# EAGLE board giraffe-cjd-simple (EAGLE 9.1.0)
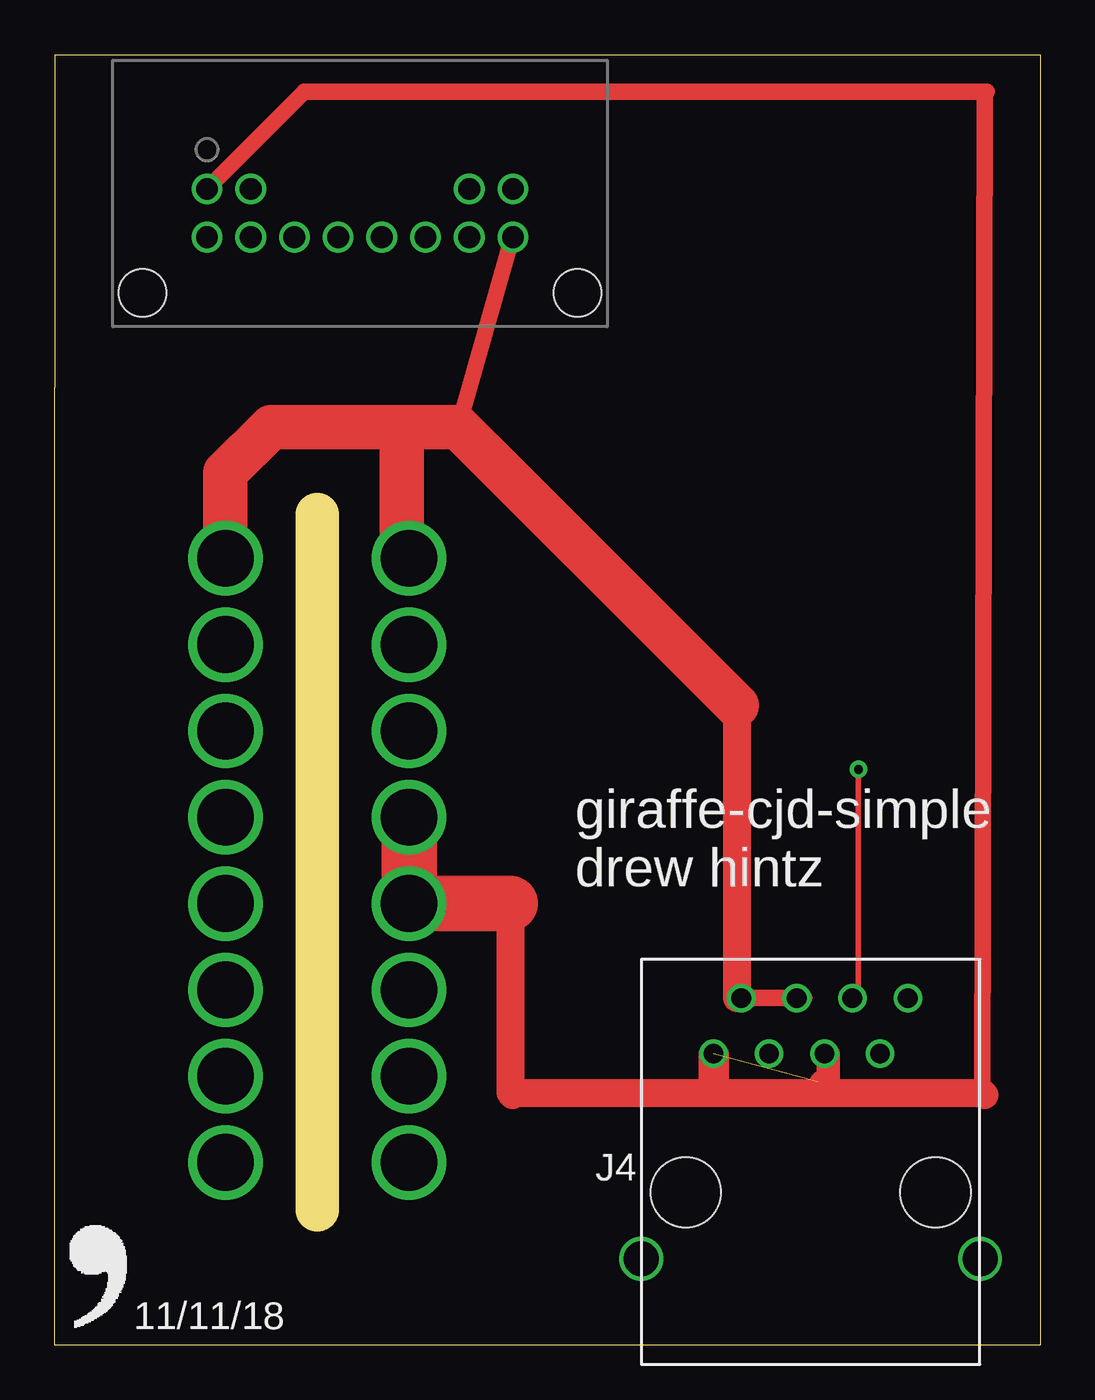
[diagram p0: board, top side]
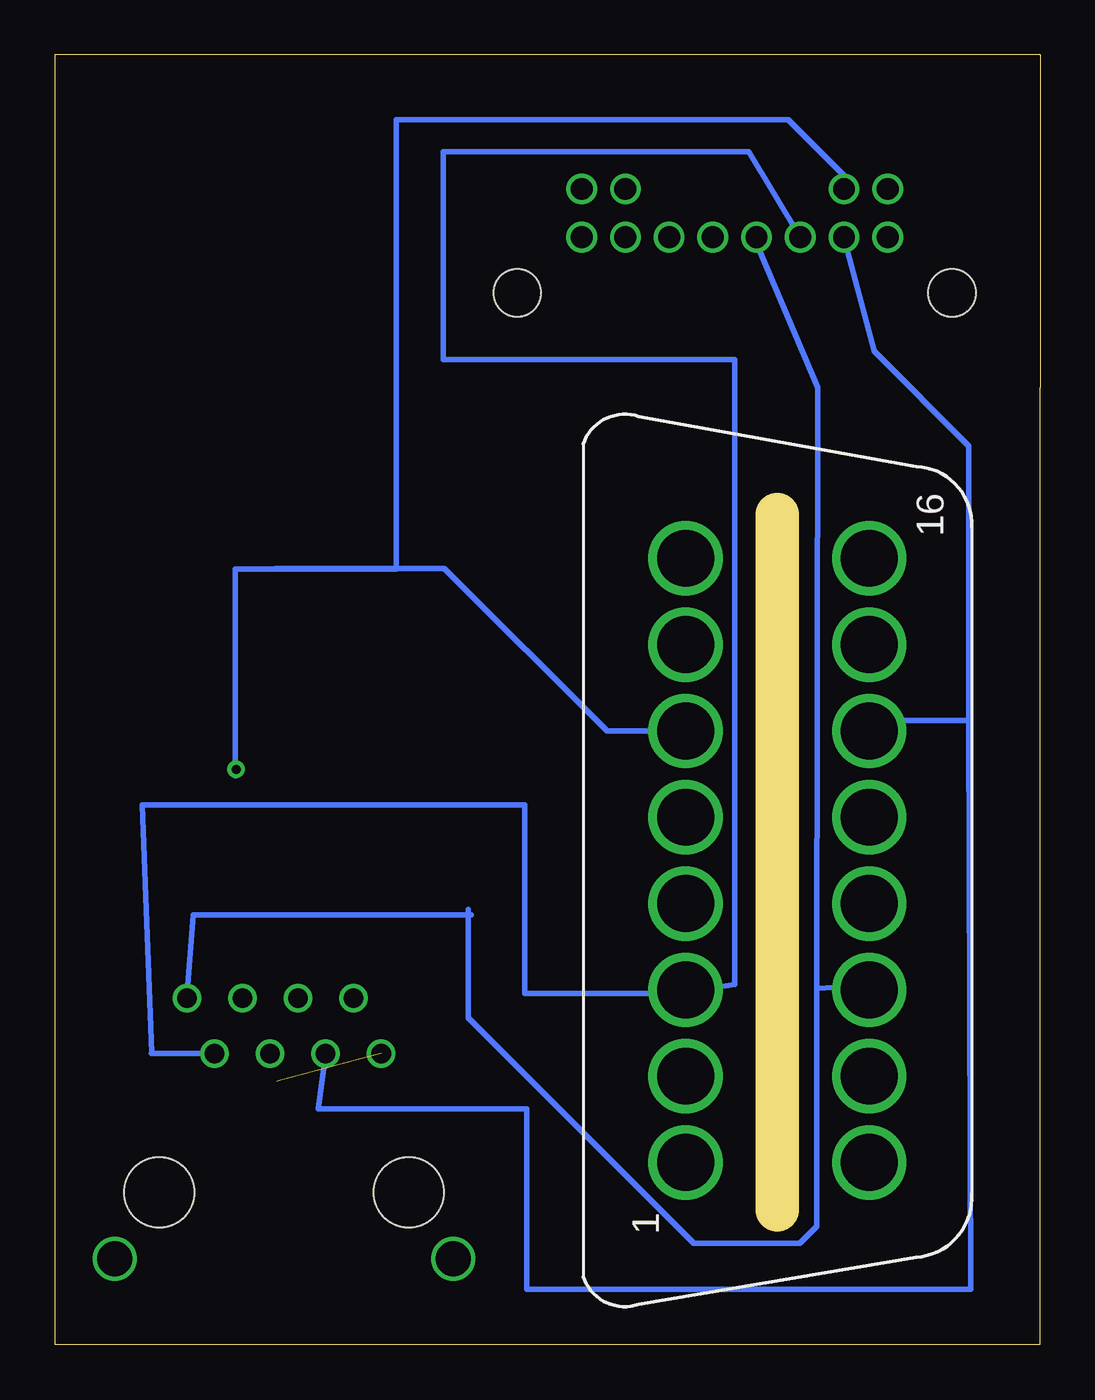
[diagram p1: board, bottom side, seen from below]

Size 45.09 x 59.05 mm. Coordinates in mm from the lower left corner, seen from the top.
Outline: 12.01,6.17 12.01,38
Outline: 0,59.05 45.09,59.05 45.09,0 0,0 0,43.81 0,59.05
Copper layers (1*16): Top 0.035mm / dielectric 1.5mm / Bottom 0.035mm
Design rules "default *": minimum track width 6mil, minimum drill 10mil, track to track 6mil, track to pad 6mil, pad to pad 6mil, via to via 6mil, smd to smd 6mil, copper to edge 15mil, drill to drill 10mil, minimum pad ring 8mil, minimum via ring 8mil, stop-mask expansion 4mil, vias tented up to drill 0mil, thermal gap 10mil

## Footprints (pad centres in the part's own frame; a part is rotated, then mirrored left to right if it is on the bottom)
MINI50-12 = drill 1: 1 -7,0.2; 2 -5,0.2; 3 5,0.2; 4 7,0.2; 5 -7,-2; 6 -5,-2; 7 -3,-2; 8 -1,-2; 9 1,-2; 10 3,-2; 11 5,-2; 12 7,-2 | hole 2.16: -9.95,-4.55; 9.95,-4.55
OBDII-FEMALE-MIDCUT = drill 2.6 pad 3.4: 1 13.825,-4.2; 2 9.875,-4.2; 3 5.925,-4.2; 4 1.975,-4.2; 5 -1.975,-4.2; 6 -5.925,-4.2; 7 -9.875,-4.2; 8 -13.825,-4.2; 9 13.825,4.2; 10 9.875,4.2; 11 5.925,4.2; 12 1.975,4.2; 13 -1.975,4.2; 14 -5.925,4.2; 15 -9.875,4.2; 16 -13.825,4.2
RA-RJ45 = drill 0.9: 1 -4.445,6.35; 2 -3.175,8.89; 3 -1.905,6.35; 4 -0.635,8.89; 5 0.635,6.35; 6 1.905,8.89; 7 3.175,6.35; 8 4.445,8.89 | drill 1.6: P$1 -7.75,-3.05; P$2 7.75,-3.05 | hole 3.2: -5.715,0; 5.715,0

## Placement (x,y rotation side)
FRAME1  FRAME-LETTERNO_PACKAGE  [DUMMY]  -8.89,-10.79 0 top  (outside the outline)
J2  [MINI50-12]  13.97,52.7 0 top
J3  OBDII-FEMALE-CUT  [OBDII-FEMALE-MIDCUT]  12.01,22.17 270 bottom
J4  RA-RJ45RA  [RA-RJ45]  34.59,6.99 0 top
U$1  [LOGO]  0.03,0.48 0 top

## Library data of the parts
FRAME1 = SparkFun-Aesthetics; DESIGNER: adhintz; VERSION: v01
J2 = comma2.ai
J3 J4 = comma.ai
U$1 = oldlib

## Nets
12VIN: J3.16
CAN1_H: J2.2
CAN1_L: J2.6 J4.3
CAN2_H: J2.7
CAN3_H: J3.12
CAN3_L: J3.13
GND: J2.1
IGN: J2.12
N$1: J4.1 J4.5
N$2: J3.4 J3.5
N$3: J4.8
N$5: J4.7

## Tracks (layer width: path | path; a pad name or v marks a point on that pad's centre or on a via)
12VIN
  Top 0.762: 31.22,15.88 34.29,15.88 | 18.47,42.01 20.95,50.8
  Top 1.27: 31.22,29.26 31.22,15.88
  Top 2.032: J3.16 7.81,39.92 9.91,42.01 15.88,42.01 | 15.88,42.01 16.51,42.01 | 16.51,42.01 18.47,42.01 31.22,29.26 | 16.51,42.01 | 16.51,42.01 | 15.88,42.01 15.88,36.2
CAN1_H
  Bottom 0.254: 16.54,28.09 19.81,28.09 27.25,35.53 30.68,35.53 34.98,35.53 35,35.51 36.83,35.51 | J2.2 8.97,53.54 11.51,56.08 29.46,56.08 29.46,35.51 36.83,35.51 | 36.83,35.51 36.83,26.04
CAN1_L
  Bottom 0.254: 3.25,28.57 3.25,41.15 7.59,45.49 J2.6 | 8.26,28.57 5.16,28.57 3.25,28.57 | 3.25,28.57 3.17,2.54 23.5,2.54 23.5,10.79 33.02,10.79 J4.3
CAN2_H
  Bottom 0.254: 16.51,16.08 23.57,16.08 23.57,24.71 41.07,24.71 40.64,13.34 | 16.51,16.08 16.1,16.08 | 16.51,16.08 13.97,16.51 13.97,45.09 27.3,45.09 27.3,54.61 13.34,54.61 J2.7
CAN2_L
  Bottom 0.254: 10.21,16.31 10.21,5.44 11,4.65 15.85,4.65 26.16,14.96 26.16,19.94 | 10.21,16.31 6.99,16.51 | 10.21,16.31 10.16,43.81 13.2,50.94
GND
  Top 0.152: 42.65,57.35 42.55,57.24
  Top 0.762: 42.65,57.35 11.41,57.35 J2.1
N$1  (1 unrouted)
  Top 0.762: J4.5 35.23,12.37 34.92,12.06
N$2
  Top 0.762: 35.56,11.54 35.56,13.34 | 29.84,11.54 30.48,12.17 30.48,13.34 29.84,13.34 29.84,12.06 | 42.44,11.54 42.55,57.15
  Top 1.27: 20.85,20.2 20.85,11.54 | 20.85,11.54 20.95,11.43 | 20.85,11.54 29.84,11.54 35.56,11.54 42.44,11.54 42.55,11.43
  Top 2.032: 16.21,22.21 J3.4
  Top 2.54: J3.5 J3.4 20.85,20.2 | 20.85,20.2 | 20.85,20.2 | 20.85,20.2 | 20.85,20.2
N$3
  Bottom 0.254: J4.8 38.73,19.68 26.04,19.68
N$4  (via drill 0.4)
  Top 0.254: 36.5,15.49 36.78,16.31 v36.78,26.34
N$5
  Bottom 0.254: 40.66,13.34 J4.7

## Text on the board
tPlace: giraffe-cjd-simple / drew hintz | 11/11/18